# Altium PCB PCB_wt88047.pcbdoc
Units mil, origin at the board's own origin, x right, y up, seen from the top; angles counter-clockwise.
Board outline 3771.1 x 4160 mil, 2 copper layers (Top Layer, Bottom Layer); 64 components, 54 nets, 233 pads, 98 vias.
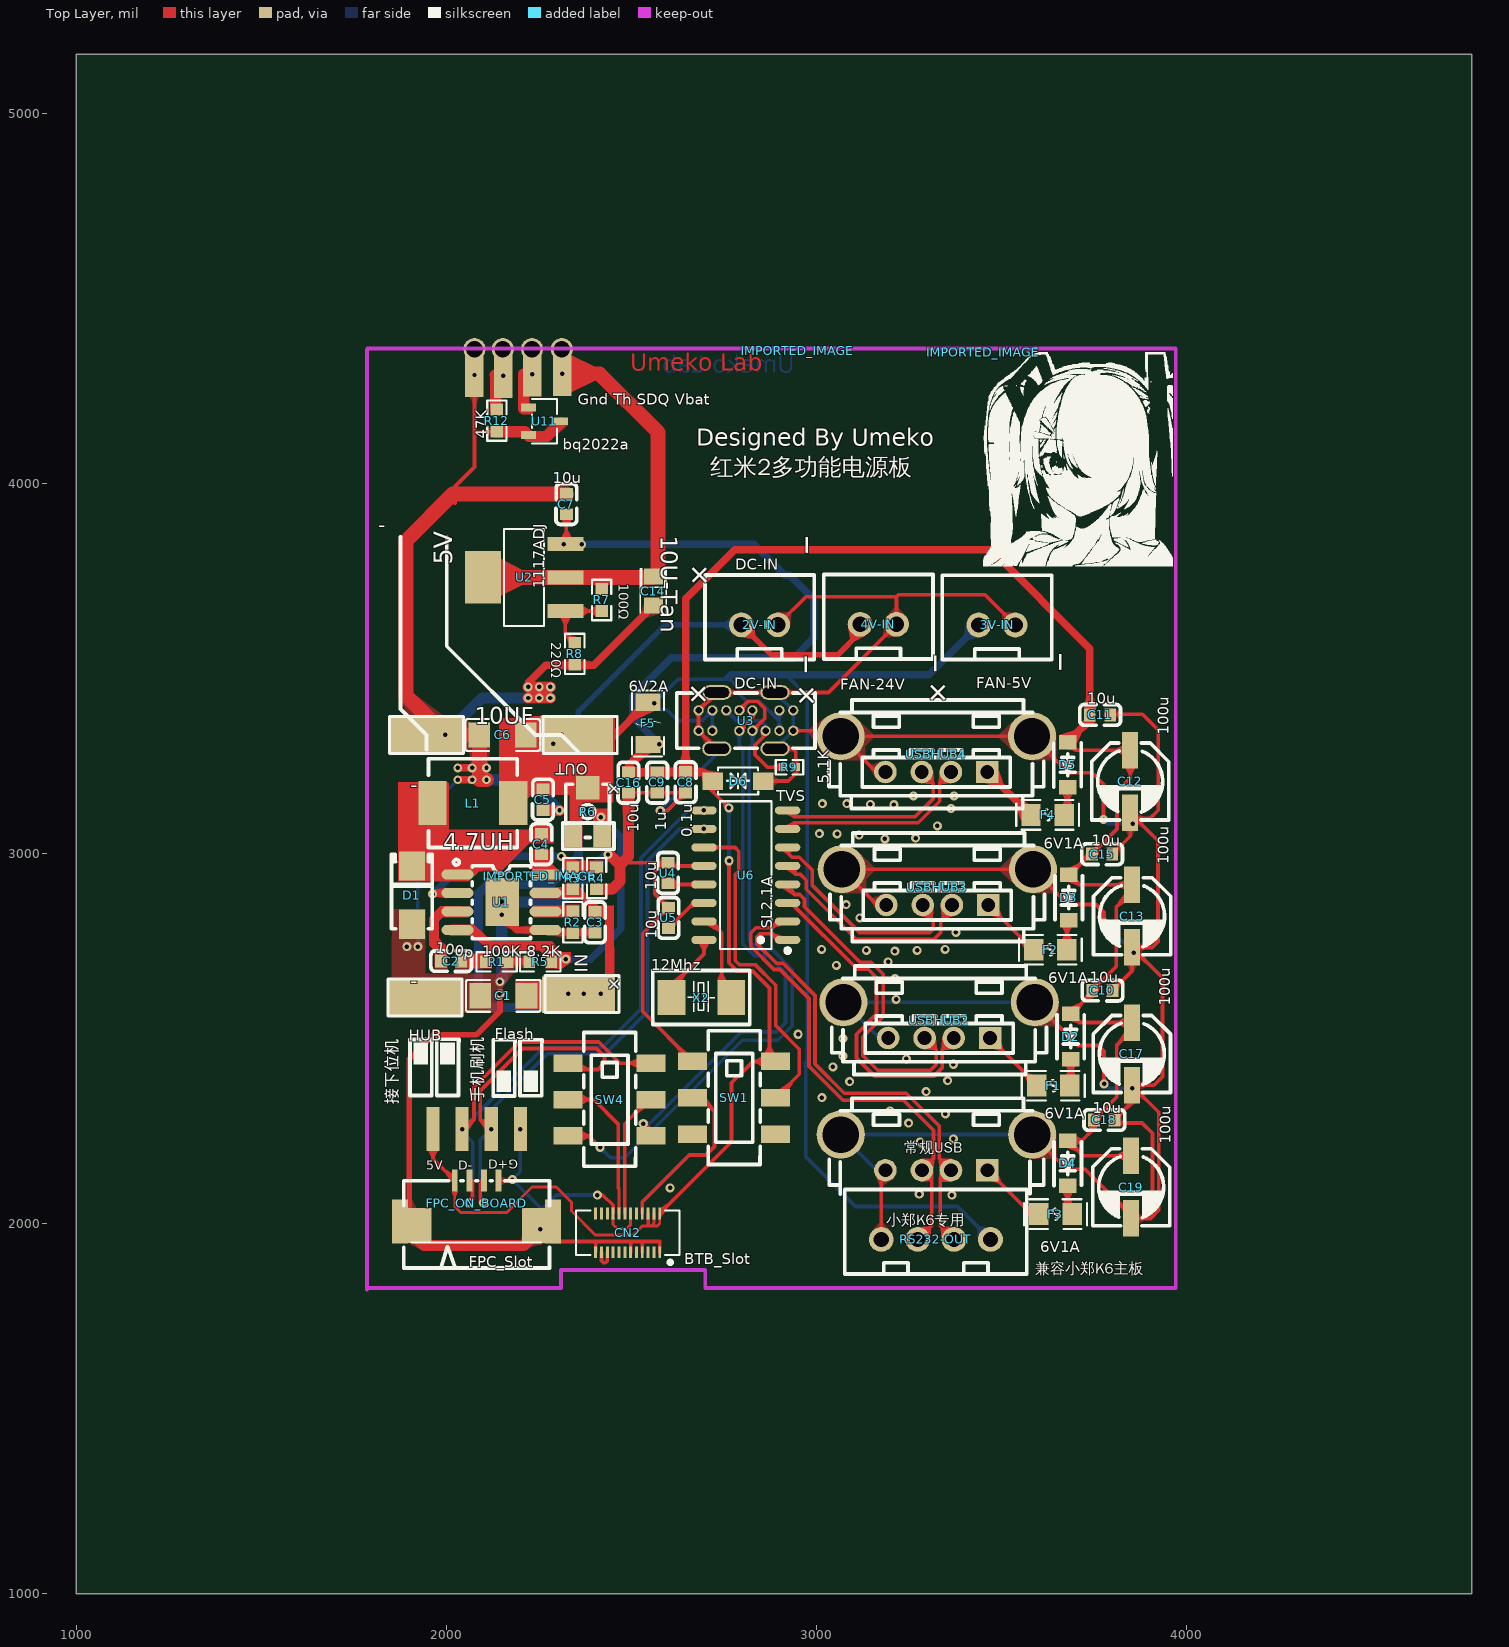
[diagram p0: Top Layer view]
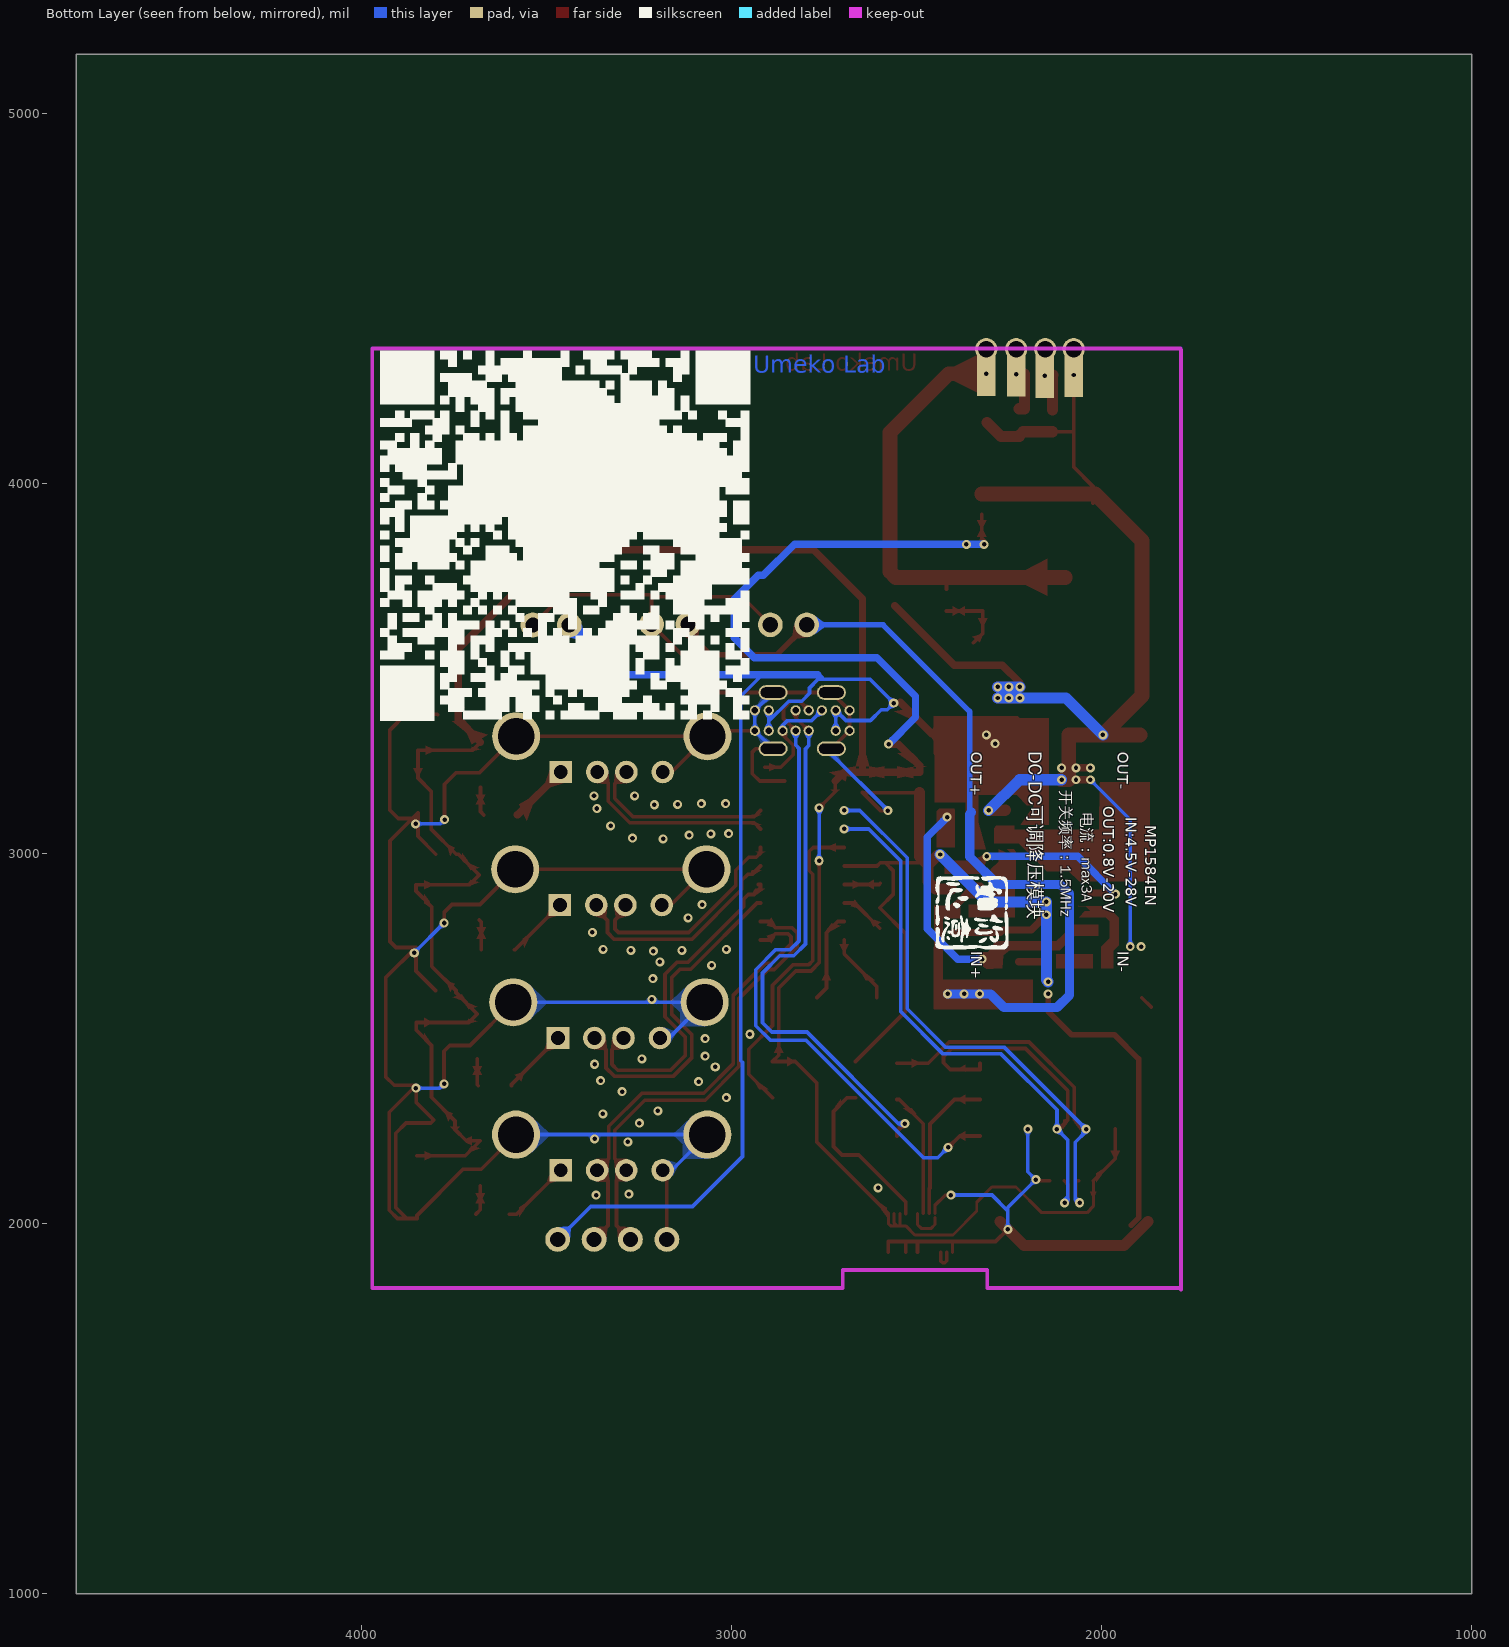
[diagram p1: Bottom Layer view, seen from below]

## Layer stack, top to bottom
Top Layer: signal copper (thickness not stored)
Dielectric: dielectric 12.6, FR-4, Dk 4.8
Bottom Layer: signal copper (thickness not stored)

## Board outline
4771.1,1000 1000,1000 1000,5160 4771.1,5160

## Components (designator, comment, footprint, x,y, rotation, side; value= is the part's Value field where it differs from the comment)
2V-IN "XH2.54-2P 直插" CONN-TH_2P-P2.50-XH2.54-2P 2846.4,3618.4 r180 top
3V-IN "XH2.54-2P 直插" CONN-TH_2P-P2.50-XH2.54-2P 3488.2,3617.9 r180 top
4V-IN "XH2.54-2P 直插" CONN-TH_2P-P2.50-XH2.54-2P 3167.4,3619.7 r180 top
C1 "10u" C1206 2153.66,2615.6 r180 top
C2 "100p" C0603 2012.66,2709.6 r180 top
C3 "100n" C0603 2401.66,2814.41 r90 top
C4 "100n" C0603 2256.66,3025.6 r90 top
C5 "100n" C0603 2260.66,3145.6 r270 top
C6 "10u" C1206 2151.66,3320.6 r180 top
C7 "10u" C0603 2324.2,3944.5 r270 top
C8 "0.1u" C0603 2646.6,3192.8 r90 top
C9 "1u" C0603 2569.8,3192.3 r90 top
C10 "10u" C0603 3773,2630 r180 top
C11 "10uF" C0603 3766.8,3375.1 r180 top
C12 "100uF" CAP-SMD_BD5.0-L5.3-W5.3-RD 3848.2,3194.9 r90 top
C13 "100uF" CAP-SMD_BD5.0-L5.3-W5.3-RD 3853.2,2831 r90 top
C14 "10uF" CAP-SMD_L2.0-W1.3-FD 2559.2,3709.5 r270 top
C15 "10uF" C0603 3772.3,2998.4 r180 top
C16 "10uF" C0603 2492.1,3192.1 r90 top
C17 "100uF" CAP-SMD_BD5.0-L5.3-W5.3-RD 3852.7,2458.5 r90 top
C18 "10uF" C0603 3778,2280 r180 top
C19 "100uF" CAP-SMD_BD5.0-L5.3-W5.3-RD 3850.9,2098.5 r90 top
CN2 "DF37NC-24DS-0.4V(51)" CONN-SMD_DF37NC-24DS-0.4V-51 2489.99,1975.07 r180 top
D1 "SS34" SMA_L4.2-W2.7-LS5.0-RD 1906.66,2887.6 r270 top
D2 "B5817WL" SOD-123F_L2.8-W1.8-LS3.7-RD 3687.6,2505.6 r90 top
D3 "B5817WL" SOD-123F_L2.8-W1.8-LS3.7-RD 3682.4,2881.3 r90 top
D4 "B5817WL" SOD-123F_L2.8-W1.8-LS3.7-RD 3679.6,2162.7 r90 top
D5 "B5817WL" SOD-123F_L2.8-W1.8-LS3.7-RD 3679,3240.1 r90 top
D6 "SMF5.0CA_C435453" SOD-123_L2.7-W1.8-LS3.7-BI 2788.2,3196.1 r180 top
F1 "BSMD0805-100-6V" F0805 3640.2,2372.7 r180 top
F2 "BSMD0805-100-6V" F0805 3632.3,2740.2 r180 top
F3 "BSMD0805-100-6V" F0805 3646.1,2025.5 r180 top
F4 "BSMD0805-100-6V" F0805 3625,3104.5 r180 top
F5 "SL0805200" F1206 2544.7,3351.9 r270 top
FPC_ON_BOARD "AFA01-S04FCC-00" FPC-SMD_AFA01-S04FCC-00 2081.63,2055.53 r0 top
IMPORTED_IMAGE "IMPORTED_IMAGE" IMPORTED_IMAGE 2949.5,4359.6 r0 top
IMPORTED_IMAGE "IMPORTED_IMAGE" IMPORTED_IMAGE 2252.46,2938.3 r0 top
IMPORTED_IMAGE "IMPORTED_IMAGE" IMPORTED_IMAGE 3450.8,4354.7 r0 top
L1 "4.7uH" IND-SMD_L6.0-W6.0_SLF6028T 2071.66,3136.6 r180 top
R1 "100k" R0603 2135.66,2707.6 r180 top
R2 "100k" R0603 2341.66,2814.6 r270 top
R3 "100k" R0603 2341.66,2933.41 r270 top
R4 "100k" R0603 2405.66,2933.6 r270 top
R5 "8.2k" R0603 2253.66,2707.6 r180 top
R6 "200kΩ" RES-ADJ-SMD_VG039NCH 2381.63,3112.64 r270 top
R7 "100" R0603 2419.7,3685.5 r90 top
R8 "200" R0603 2346.8,3540 r270 top
R9 "5.1k" R0402 2927.2,3233.7 r0 top
R12 "47K" R0603 2136.1,4170.5 r270 top
RS232-OUT "XH2.54-4P" CONN-TH_4P-P2.50-XH2.54-4P 3322.9,1957 r180 top
SW1 "MST22D18G2 125" SW-SMD_MST22D18G2 2777.6,2339.8 r270 top
SW4 "MST22D18G2 125" SW-SMD_MST22D18G2 2441,2335.2 r270 top
U1 "MP1584EN" SOIC-8_L4.9-W3.9-P1.27-LS6.0-BL-EP3.3 2148.66,2868.6 r270 top
U2 "AMS1117-ADJ_C5181463" SOT-223-4_L6.5-W3.5-P2.30-LS7.0-BR 2209.9,3746.5 r0 top
U3 "TYPE-C 14PLC-H10.0" USB-C-TH_SHOUHAN_TYPE-C-14PLC-H10.0 2809.4,3359.5 r180 top
U4 "10uF" C0603 2598.7,2947.5 r270 top
U5 "10uF" C0603 2600.1,2826.1 r270 top
U6 "SL2.1A" SOP-16_L10.0-W3.9-P1.27-LS6.0-BL 2809.2,2941.6 r90 top
U11 "BQ2022ADBZR" SOT-23-3_L3.0-W1.7-P0.95-LS2.9-BR 2264.8,4168.7 r180 top
USBHUB2 "U-USBAS04P-F004" USB-A-TH_USB-A-M3A-4PLF 3331.8,2549.8 r180 top
USBHUB3 "U-USBAS04P-F004" USB-A-TH_USB-A-M3A-4PLF 3326.8,2909.3 r180 top
USBHUB4 "U-USBAS04P-F004" USB-A-TH_USB-A-M3A-4PLF 3324.2,3268.8 r180 top
X2 "SMD5032-2PIN_8MHZ±20PPM20P" CRYSTAL-SMD_L5.0-W3.2-1-A 2688.9,2611 r180 top
? "" ? 4100.14,3095.5 r0 top

## Footprints (in the part's own frame and the unit in brackets; to place one, negate y for a bottom-side part, rotate by r counter-clockwise, add the part's x,y. Pads: shape width x height; smd on the part's side, far side on the other; paste and mask are expansions set on the pad)
C0603 [mm]
  rect 0.8x0.9 smd paste+0 mask+0.051: 1(-0.7,0) 2(0.7,0)
  silkscreen extent -1.41,-0.71 1.39,0.72
C1206 [mm]
  rect 1.485x1.728 smd paste-100 mask+0.051: 1(-1.593,0) 2(1.593,0)
  silkscreen extent -2.56,-1.09 2.56,1.09
CAP-SMD_BD5.0-L5.3-W5.3-RD [mm]
  rect 2.5x1.1 smd paste+0 mask+0.051: 1(2.15,0) 2(-2.15,0)
  silkscreen extent -2.65,-2.65 2.64,2.65
CAP-SMD_L2.0-W1.3-FD [mm]
  rect 1.1x1.3 smd paste+0 mask+0.05: 1(-1,0) 2(1,0)
  silkscreen extent -1.57,-0.89 1.52,0.89
CONN-SMD_DF37NC-24DS-0.4V-51 [mm]
  rect 0.2x0.8 smd paste+0 mask+0.051: 1(-2.2,1.325) 2(-2.2,-1.325) 3(-1.8,1.325) 4(-1.8,-1.325) 5(-1.4,1.325) 6(-1.4,-1.325) 7(-1,1.325) 8(-1,-1.325) 9(-0.6,1.325) 10(-0.6,-1.325) 11(-0.2,1.325) 12(-0.2,-1.325) 13(0.2,1.325) 14(0.2,-1.325) 15(0.6,1.325) 16(0.6,-1.325) 17(1,1.325) 18(1,-1.325) 19(1.4,1.325) 20(1.4,-1.325) 21(1.8,1.325) 22(1.8,-1.325) 23(2.2,1.325) 24(2.2,-1.325)
  silkscreen extent -3.56,-1.52 3.56,2.16
CONN-TH_2P-P2.50-XH2.54-2P [mm]
  round 1.7 hole 1.05 paste+0 mask+0.05: 1(1.25,0) 2(-1.25,0)
  silkscreen extent -3.75,-3.42 3.75,2.37
CONN-TH_4P-P2.50-XH2.54-4P [mm]
  round 1.7 hole 1.05 paste+0 mask+0.05: 1(3.75,0) 2(1.25,0) 3(-1.25,0) 4(-3.75,0)
  silkscreen extent -6.25,-3.42 6.25,2.37
CRYSTAL-SMD_L5.0-W3.2-1-A [mm]
  rect 1.9x2.4 smd paste+0 mask+0.051: 1(-2.05,0) 2(2.05,0)
  silkscreen extent -3.32,-1.85 3.33,1.85
F0805 [mm]
  rect 1.335x1.5 smd paste-100 mask+0.051: 1(-1.142,0) 2(1.142,0)
  silkscreen extent -2.16,-1.02 2.16,1.02
F1206 [mil]
  rect 46.85x68.03 smd paste+0 mask+2: 1(-56.89,0) 2(56.89,0)
  silkscreen extent -89,-43 89,43
FPC-SMD_AFA01-S04FCC-00 [mm]
  rect 0.4x1.5 smd paste+0 mask+0.051: 1(-1.501,1.536) 2(-0.501,1.536) 3(0.498,1.536) 4(1.499,1.536)
  rect 2x2.4 smd paste+0 mask+0.051: 5(-4.1,-1.536) 6(4.1,-1.536)
  silkscreen extent -5,-4.46 5,1.53
IMPORTED_IMAGE [mil]
IND-SMD_L6.0-W6.0_SLF6028T [mm]
  rect 1.95x3 smd paste+0 mask+0.051: 1(2.775,0) 2(-2.775,0)
  silkscreen extent -3.05,-3.05 3.05,3.05
R0402 [mm]
  rect 0.566x0.54 smd paste-100 mask+0.051: 1(-0.433,0) 2(0.433,0)
  silkscreen extent -0.94,-0.5 0.94,0.5
R0603 [mil]
  rect 31.75x34.02 smd paste-3937.01 mask+2: 1(-29.65,0) 2(29.66,0)
  silkscreen extent -55,-26 55,26
RES-ADJ-SMD_VG039NCH [mm]
  rect 1.5x1.2 smd paste+0 mask+0.051: 1(1.65,-1) 3(1.65,1)
  rect 1.6x1.6 smd paste+0 mask+0.051: 2(-1.65,0)
  silkscreen extent -1.9,-1.5 1.75,1.5
SMA_L4.2-W2.7-LS5.0-RD [mm]
  rect 2x1.8 smd paste+0 mask+0.051: 1(-2,0) 2(2,0)
  silkscreen extent -2.79,-1.4 2.3,1.4
SOD-123_L2.7-W1.8-LS3.7-BI [mm]
  rect 1.4x1.2 smd paste+0 mask+0.051: 1(-1.735,0) 2(1.735,0)
  silkscreen extent -1.38,-0.93 1.38,0.93
SOD-123F_L2.8-W1.8-LS3.7-RD [mm]
  rect 1x1.2 smd paste+0 mask+0.051: 1(-1.55,0) 2(1.55,0)
  silkscreen extent -1.52,-0.93 1.49,0.95
SOIC-8_L4.9-W3.9-P1.27-LS6.0-BL-EP3.3 [mm]
  oval 0.7x2.2 smd paste+0 mask+0.05: 1(-1.905,-3.023) 2(-0.635,-3.023) 3(0.635,-3.023) 4(1.905,-3.023) 5(1.905,3.023) 6(0.635,3.023) 7(-0.635,3.023) 8(-1.905,3.023)
  rect 3.3x2.3 smd paste+0 mask+0.05: 9(0,0.051)
  silkscreen extent -2.93,-3.29 2.5,2
SOP-16_L10.0-W3.9-P1.27-LS6.0-BL [mm]
  oval 0.56x1.745 smd paste+0 mask+0.051: 1(-4.445,-2.873) 2(-3.175,-2.873) 3(-1.905,-2.873) 4(-0.635,-2.873) 5(0.635,-2.873) 6(1.905,-2.873) 7(3.175,-2.873) 8(4.445,-2.873) 9(4.445,2.873) 10(3.175,2.873) 11(1.905,2.873) 12(0.635,2.873) 13(-0.635,2.873) 14(-1.905,2.873) 15(-3.175,2.873) 16(-4.445,2.873)
  silkscreen extent -5.33,-3.02 5.08,1.77
SOT-23-3_L3.0-W1.7-P0.95-LS2.9-BR [mm]
  rect 1.037x0.532 smd paste+0 mask+0.051: 1(1.101,-0.95) 2(1.101,0.95) 3(-1.101,0)
  silkscreen extent -0.86,-1.53 0.86,1.53
SOT-223-4_L6.5-W3.5-P2.30-LS7.0-BR [mm]
  rect 2.47x0.98 smd paste+0 mask+0.051: 1(2.835,-2.3) 2(2.835,0) 3(2.835,2.3)
  rect 2.47x3.6 smd paste+0 mask+0.051: 4(-2.835,0)
  silkscreen extent -1.37,-3.33 1.37,3.33
SW-SMD_MST22D18G2 [mm]
  rect 1.2x2 smd paste+0 mask+0.051: 1(-2.5,2.85) 2(0,2.85) 3(2.5,2.85) 4(-2.5,-2.85) 5(0,-2.85) 6(2.5,-2.85)
  silkscreen extent -4.6,-1.78 4.57,1.8
USB-A-TH_USB-A-M3A-4PLF [mm]
  rect 1.55x1.524 hole 0.95 paste+0 mask+0.051: 1(-3.5,1.225)
  round 1.55 hole 0.95 paste+0 mask+0.051: 2(-1,1.225) 3(1,1.225) 4(3.5,1.225)
  round 3.3 hole 2.5 paste+0 mask+0.051: 5(-6.57,-1.225) 5(6.57,-1.225)
  silkscreen extent -7.37,-3.72 7.37,3.73
USB-C-TH_SHOUHAN_TYPE-C-14PLC-H10.0 [mm]
  oval 2x1 hole 0.7 slot 1.7 at 0 deg paste+0 mask+0.051: 0(-2,1.93) 0(-2,-1.93) 0(2,1.93) 0(2,-1.93)
  round 0.7 hole 0.45 paste+0 mask+0.051: A1(-3.25,0.7) A4(-2.3,0.7) A5(-1.35,0.7) A6(-0.45,0.7) A7(0.45,0.7) A9(2.3,0.7) A12(3.25,0.7) B1(3.25,-0.7) B4(2.3,-0.7) B5(1.35,-0.7) B6(0.45,-0.7) B7(-0.45,-0.7) B9(-2.3,-0.7) B12(-3.25,-0.7)
  silkscreen extent -4.75,-1.9 4.75,1.9
? [mil]

## Free pads (board coordinates)
  round 60 hole 45 paste+0 mask+2: 1(2075.78,4363.6) 2(2231.26,4363.62) 3(2152.52,4363.62) 4(2312,4363.59)
  rect 35.43x118.11 smd paste+0 mask+2: 1(2199.71,2255.49) 2(2120.97,2255.49) 3(2042.23,2255.49) 4(1963.49,2255.49)
  rect 61.02x60 hole 37.4 paste+0 mask+2: 1(3462.2,2144.1)
  round 61.02 hole 37.4 paste+0 mask+2: 2(3363.76,2144.1) 3(3285.03,2144.1) 4(3186.61,2144.1)
  rect 43.31x118.11 smd paste+0 mask+2: 5(1874.91,2005.49) 6(2288.29,2005.49)
  round 129.92 hole 98.43 paste+0 mask+2: 5(3065.74,2240.56) 5(3583.06,2240.55)
  rect 196.85x98.42 smd paste+0 mask+2: 8(1942,2608.6) 8(1947,3318.6) 8(2352,3323.6) 8(2357,2618.6)
  rect 50x120 hole 12 paste+0 mask+2: 8(2075.78,4293.6) 8(2153.58,4292) 8(2231.38,4295.1) 8(2312.58,4297.2)

## Via types
v1: diameter 24.41, hole 12.2, Top Layer to Bottom Layer, tented both sides, 74 vias
v2: diameter 24, hole 12, Top Layer to Bottom Layer, tented both sides, 24 vias

## Nets (pads, with @x,y where several pads share a name; then routed paths per layer and width w, separated by ;. In a path a pad name is that pad's centre, name@x,y a point inside that pad or via, vN(x,y) a via of type N, cw(c..) or ccw(c..) an arc to the next point about the centre after c; other vN are vias at no path point)
4.2V: C14.1 pad.4@2312,4363.59 pad.8@2312.58,4297.2 R7.2 U2.2 U2.4 | length 1222.7
  Top Layer w10: 2405.9,3745.5 2419.7,3731.7 R7.2
  Top Layer w40: U2.4 2324.8,3746.5 U2.2@2325.8,3745.5 ; pad.8@2312.6,4297.2 2413.4,4297.2 2572,4138.6 2572,3761.7 C14.1 2556.8,3746.5 U2.2
5V: C7.2 C8.2 C9.2 C10.2 C11.2 C12.1 C13.1 C15.2 C16.2 C17.1 C18.2 C19.1 CN2.2 CN2.4 CN2.6 D2.2 D3.2 D4.2 D5.2 D6.2 F5.2 FPC_ON_BOARD.1 pad.4@1963.49,2255.49 SW1.1 U2.3 | length 8408.3
  Top Layer w8: FPC_ON_BOARD.1 2022.5,2046.9 2039.1,2029.3 2162,2029.3 2231.3,2098.6 2297,2098.6 2337.7,2057.9 2337.7,2033.6 2401.9,1969.4 2505.2,1969.4 2529.8,1994 2545.1,1994 2570.3,1994 2576.6,2000.3 CN2.2@2576.6,2027.3 ; 2545.1,1993 2552.8,1993 2560.9,2001.1 CN2.4@2560.9,2027.3
  Top Layer w9.2: 2545.1,1994 CN2.6
  Top Layer w10: pad.4@1963.5,2255.5 1963.5,2175.1 FPC_ON_BOARD.1 ; U2.3@2321.5,3837 2324.2,3837 C7.2 ; CN2.2 2770.5,2221.1 2770.5,2380.4 2828.3,2438.2 SW1.1 2873.1,2454.9 2873.1,2636.8 2827,2682.9 2785.7,2682.9 2763.8,2704.8 v1(2763.8,2980.7) ; D6.2 2719.9,3167.4 v1(2763.5,3123.8) ; D5.2 3700.6,3279.5 C12.1 3848.2,3204 3812.5,3168.3 3812.5,3066.2 C15.2 3738.5,2998.4 D3.2 3709,2915.7 3853.2,2915.7 3853.2,2899 3810.5,2856.3 3810.5,2695.1 C10.2 3745.4,2624.4 D2.2 3711,2543.2 3852.7,2543.2 3852.7,2522.9 3811.5,2481.7 3811.5,2341.1 C18.2 3747.9,2277.5 3747.9,2254.2 3717.4,2223.7 D4.2 3720.1,2183.2 C19.1@3850.9,2183.2
  Top Layer w20: v1(2575.7,3296) 2550.2,3296 2492.1,3237.9 C16.2 C8.2 ; D6.2 2695.6,3220.4 C8.2 ; D5.2 3739.2,3361.3 C11.2 3739.2,3553.9 3472.3,3820.8 2778.9,3820.8 2646.6,3688.5 C8.2
  Bottom Layer w10: v1(2763.5,3123.8) v1(2763.8,2980.7)
  Bottom Layer w20: v1(2317.5,3836.1) 2830.4,3836.1 2914.3,3752.2 2928.3,3752.2 2993.3,3687.2 2993.3,3583.2 2939.3,3529.2 2607.3,3529.2 2503.3,3425.2 2503.3,3368.2 v1(2575.7,3296)
  other v1: 2365.6,3836
ADJ: R7.1 R8.1 U2.1 | length 195.1
  Top Layer w10: R8.1 2321.5,3595 2321.5,3656 2419.5,3656 R7.1
C2_1: C2.1 R1.2
C2_2: C2.2 U1.3
CN2_19: CN2.19 CN2.21 | length 67.9
  Top Layer w9.84: CN2.21 2419.1,1899.2 2424.6,1893.7 2429.7,1893.7 2434.9,1898.9 CN2.19
D1+: U6.8 USBHUB4.3 | length 505.9
  Top Layer w10: U6.8 2939.3,3099.6 2979.3,3099.6 3266.6,3099.6 3316.2,3149.2 3316.2,3189.2 USBHUB4.3
D1-: U6.7 USBHUB4.2 | length 533.7
  Top Layer w10: U6.7 2939.3,3083.6 3275.5,3083.6 3333.7,3141.8 3333.7,3190.7 USBHUB4.2
D1_1: C4.2 D1.1 L1.1 U1.1
D2+: U6.6 USBHUB3.3 | length 601.8
  Top Layer w10: U6.6 2922.3,3001.6 2933.9,2990 2953.9,2990 2989.1,2954.8 2989.1,2913.8 3116.2,2786.7 3306.2,2786.7 3315.5,2796 3315.5,2820.2 3287.4,2848.3 USBHUB3.3
D2-: U6.5 USBHUB3.2 | length 604.1
  Top Layer w10: U6.5 2945.1,2943.8 2956.9,2943.8 2972.6,2928.1 2972.6,2903.8 3107.6,2768.8 3318,2768.8 3335.8,2786.6 3335.8,2819.4 3366.2,2849.8 USBHUB3.2
D2_1: D2.1 F1.1 | length 72.9
  Top Layer w10: F1.1 3687.6,2375.1 D2.1
D3+: U6.4 USBHUB2.3 | length 929.4
  Top Layer w10: U6.4@2927.7,2916.6 U6.4 2922.3,2906.8 2939.8,2889.3 2955,2889.3 2967.9,2876.4 2967.9,2856.3 3118,2706.2 3148,2706.2 3180.4,2673.8 3180.4,2558.9 3125.5,2504 3125.5,2454.5 3165.5,2414.5 3308.1,2414.5 3323.8,2430.2 3323.8,2470.2 USBHUB2.3
D3-: U6.3 USBHUB2.2 | length 918.4
  Top Layer w10: U6.3 2931.4,2866.6 3110.9,2687.1 3139.9,2687.1 3162.5,2664.5 3162.5,2566.1 3108.4,2512 3108.4,2447.2 3157.1,2398.5 3317.7,2398.5 3339.8,2420.6 3339.8,2470.2 USBHUB2.2
D3_1: D3.1 F2.1 | length 82.2
  Top Layer w10: F2.1 3677.3,2815.2 D3.1
D4+: pad.3@3285.03,2144.1 RS232-OUT.2 U6.2 | length 1290.9
  Top Layer w10: U6.2 2899,2816.6 2882,2799.6 2837,2799.6 2822.5,2785.1 2822.5,2749.4 2885.1,2686.8 2901.8,2686.8 2980.2,2608.4 2980.2,2424.9 3071.6,2333.5 3235.1,2333.5 3316.4,2252.2 3316.4,2175.5 pad.3@3285,2144.1 ; RS232-OUT.2 3311.7,1995.01 3311.7,2117.43 pad.3@3285.03,2144.1
D4-: pad.2@3363.76,2144.1 RS232-OUT.3 U6.1 | length 1264.3
  Top Layer w10: U6.1 2899,2766.6 2882.1,2783.5 2847.8,2783.5 2839.7,2775.4 2839.7,2755.9 2891.6,2704 2908.8,2704 2996.2,2616.6 2996.2,2431.6 3075.3,2352.5 3242.8,2352.5 3332.4,2262.9 3332.4,2175.5 pad.2@3363.8,2144.1 ; pad.2@3363.77,2144.1 3334.6,2114.93 3334.6,1994.51 RS232-OUT.3
D4_1: D4.1 F3.1 | length 81
  Top Layer w10: D4.1 3679.6,2037 F3.1
DN: FPC_ON_BOARD.2 pad.3@2042.23,2255.49 SW4.1 U6.9 | length 2221.5
  Top Layer w10: v1(2042.22,2255.5) 2048.8,2255.5 2074.3,2281 2074.3,2368.5 2196.5,2490.7 2411.9,2490.7 2469,2433.6 SW4.1 ; v1(2059.8,2056.25) 2070.2,2066.6 2070.2,2116 FPC_ON_BOARD.2
  Bottom Layer w10: v1(2059.8,2056.25) 2071.4,2067.8 2071.4,2219.8 2042.2,2249 v1(2042.22,2255.5) 2262.9,2476.2 2421.4,2476.2 2525.7,2580.5 2525.7,2988.5 2653.8,3116.6 v1(2696.11,3116.6)
DN_BTB: CN2.14 SW4.2 | length 340.9
  Top Layer w9.2: CN2.14 2482.1,2094.4
  Top Layer w10: 2482.1,2094.4 2482.1,2270 2547.3,2335.2 SW4.2
DN_TYPEC: SW4.3 U3.A7 U3.B7 | length 1472.7
  Top Layer w10: v1(2532,2270) 2553.2,2248.8 SW4.3 ; U3.A7@2791.68,3331.96 2827.08,3367.36 U3.B7
  Bottom Layer w10: v1(2532,2270) 2549,2270 2796.6,2517.6 2891.8,2517.6 2916.7,2542.5 2916.7,2677.5 2870.3,2723.9 2832.4,2723.9 2800.6,2755.7 2800.6,3283 2791.7,3291.9 U3.A7
DP: FPC_ON_BOARD.3 pad.2@2120.97,2255.49 SW4.4 U6.10 | length 2113.8
  Top Layer w10: v1(2100.16,2056) 2091.1,2065.1 2091.1,2105.9 FPC_ON_BOARD.3 ; v1(2121,2255.5) 2115.9,2255.5 2091.7,2279.7 2091.7,2359.3 2205.6,2473.2 2405.5,2473.2 2427.4,2451.3 2427.4,2434.6 2409.4,2416.6 2328.8,2416.6 SW4.4
  Bottom Layer w10: v1(2100.16,2056) 2091.66,2064.5 2091.66,2226.16 v1(2121,2255.5) 2121,2307.5 2272.1,2458.6 2428.9,2458.6 2543.4,2573.1 2543.4,2980.2 2629.8,3066.6 v1(2696.11,3066.6)
DP_BTB: CN2.16 SW4.5 | length 406.9
  Top Layer w9.2: 2464,2095.4 2466.4,2095.4 CN2.16
  Top Layer w10: SW4.5 2397.9,2335.2 2464,2269.1 2464,2095.4
DP_TYPEC: SW4.6 U3.A6 U3.B6 | length 1811.9
  Top Layer w10: SW4.6 2383.9,2236.8 v1(2415.1,2205.6) ; U3.B6 2816.79,3412.15 2840.29,3412.15 2860.29,3392.15 2860.29,3365.11 U3.A6
  Bottom Layer w10: v1(2415.1,2205.6) 2443.1,2177.6 2481.7,2177.6 2799.3,2495.2 2895.5,2495.2 2935,2534.7 2935,2686.2 2880.7,2740.5 2841.8,2740.5 2818.2,2764.1 2818.2,3284.4 2827.1,3293.3 U3.A6
F4_1: D5.1 F4.1 | length 78.3
  Top Layer w10: F4.1 3679,3113.5 D5.1
GND: 2V-IN.2 3V-IN.2 4V-IN.2 C1.2 C3.1 C5.2 C6.2 C7.1 C8.1 C9.1 C10.1 C11.1 C12.2 C13.2 C14.2 C15.1 C16.1 C17.2 C18.1 C19.2 CN2.1 CN2.7 CN2.11 CN2.12 CN2.18 CN2.23 D1.2 D6.1 FPC_ON_BOARD.4 FPC_ON_BOARD.5 FPC_ON_BOARD.6 pad.1@2075.78,4363.6 pad.1@2199.71,2255.49 pad.4@3186.61,2144.1 pad.5 pad.6 pad.8@1942,2608.6 pad.8@1947,3318.6 pad.8@2075.78,4293.6 R1.1 R2.2 R4.2 R5.2 R8.2 R9.2 R12.2 RS232-OUT.1 SW1.4 U1.5 U1.9 U3.0 U3.A1 U3.A12 U3.B1 U3.B12 U4.1 U5.1 U6.12 U11.2 U11.3 USBHUB2.4 USBHUB2.5 USBHUB3.4 USBHUB3.5 USBHUB4.4 USBHUB4.5 | length 18259.3
  Top Layer w8: CN2.18@2450.5,2016.5 2450.5,1997.2 2460.6,1987.1 2488,1987.1 2497.9,1997 CN2.12@2497.9,2027.3
  Top Layer w9.05: 2403.2,1951.3 2403.4,1940.1 CN2.23
  Top Layer w9.2: v1(2407.9,2077) 2422.7,2077 2450.6,2049.1 CN2.18@2450.6,2027.3
  Top Layer w10: pad.8@1865.66,2584.6 pad.8@1891.66,2610.6 ; 2023.3,3947 2023.3,3992.6 2075.8,4045.1 pad.8@2075.8,4293.6 ; 2075.8,4140.2 R12.2@2133.2,4140.2 ; FPC_ON_BOARD.4 2175.4,2116 v1(2178,2118.6) ; FPC_ON_BOARD.6@2253.5,1984.5 2286.8,1951.3 2403.2,1951.3 2576.6,1951.3 CN2.1 ; v2(2436.66,2997.6) 2459.2,2975.1 U4.1 ; C16.1 C8.1 2597.6,3116.2 v1(2577.9,3116.2) ; 2497.8,1951.3 2497.9,1940.1 CN2.11 ; CN2.7@2529.4,1922.2 2529.4,1939.4 2529.6,1951.3 ; SW1.4 2530.3,2573.3 2530.3,2783.9 U5.1 2563,2890.8 2563,2953.2 2584.9,2975.1 U4.1 ; U3.A12 U3.0@2730.7,3283.5 ; U3.B1 2730.7,3435.5 U3.0@2888.1,3435.5 ; U3.A12 U3.B1@2681.43,3387.02 ; U6.12 2607.2,2966.6 U4.1 ; D6.1 2924.2,3196.1 2944.2,3216.1 R9.2 2944.2,3274.6 2935.4,3283.5 U3.0@2888.1,3283.5 ; U3.0@2888.2,3435.5 3032.4,3435.5 4V-IN.2 3216.61,3694.51 ; 2V-IN.2 2971.74,3694.51 3216.61,3694.51 ; U3.A1 3050.62,3331.95 USBHUB4.5@3065.54,3317.03 ; RS232-OUT.1 3175.26,2132.75 pad.4@3186.61,2144.1 ; USBHUB4.4 3162,3220.57 USBHUB4.5@3065.54,3317.03 ; USBHUB3.4 3164.6,2861.07 3068.14,2957.53 3585.47,2957.53 3680.6,2862.4 3756,2862.4 3777.4,2841 v1(3777.4,2812.4) ; 3V-IN.2 3455.72,3699.6 3221.7,3699.6 3216.61,3694.51 ; pad.5@3583.1,2240.6 3676.8,2146.8 3726.2,2146.8 3850.9,2022.1 C19.2@3850.9,2013.8 ; USBHUB2.5@3590.47,2598.03 3707.2,2481.3 3761.9,2481.3 3777.6,2465.6 v1(3777.6,2377.5) ; v1(3776.1,3091.9) 3776.1,3187.4 3745.1,3218.4 3681.5,3218.4 3582.87,3317.03 USBHUB4.5@3065.54,3317.03 ; C11.1 3796.2,3376.9 3881.1,3376.9 3924,3334 3924,3117.1 3901.6,3094.7 3848.2,3094.7 C12.2 ; C15.1 3848.2,3046.7 C12.2 ; C10.1 3853.2,2682.6 C13.2@3853.2,2746.3 ; C12.2 3923.5,3035 3923.5,2762.1 3907.8,2746.3 C13.2@3853.2,2746.3 ; C19.2@3850.9,2013.8 3903.3,2013.8 3925.5,2036.1 3925.5,2301.1 C17.2@3852.7,2373.8 ; C19.2@3850.9,2013.8 3878.7,2013.8 3908.2,2043.3 3908.2,2244 3880.3,2271.9 3813.7,2271.9 C18.1 3852.7,2327.1 C17.2@3852.7,2373.8 ; C17.2@3852.7,2373.8 3912.2,2373.8 3935.5,2397.1 3935.5,2664.1 C13.2@3853.2,2746.3
  Top Layer w15: FPC_ON_BOARD.5@1920.2,1995.1 1900,2015.3 1900,2445.1 1965.3,2510.4 2081.3,2510.4 2144.7,2573.8 v2(2144.66,2620.6)
  Top Layer w20: v2(2030.66,3199.6) v2(2108.26,3199.6) ; v2(2030.66,3231.6) v2(2108.26,3231.6) ; v2(2149.36,2834.6) 2190.4,2793.6 U1.5 2274.5,2786.8 C3.1@2401.7,2786.8 ; R1.1@2165.4,2707.6 R5.2 ; v2(2220.9,3450.5) 2220.9,3461.5 2268.4,3509 2398.1,3509 C14.2
  Top Layer w30: pad.5@1874.9,2005.5 1939.9,1940.5 2209.5,1940.5 pad.6@2274.5,2005.5 ; R12.2@2133.2,4140.2 2212.5,4140.2 U11.2 2222.7,4130 2222.7,4127.7 2272.1,4127.7 U11.3@2309.5,4165.1 ; v2(2220.9,3420.5) v2(2280.9,3420.5) ; v2(2220.9,3450.5) v2(2280.9,3450.5) ; C5.2 2262.1,3116.6 v2(2305.66,3116.6) ; R4.2 2448.7,2903.9 2469.4,2924.6 2469.4,2969.6 ; v2@2442.5,2996.5 2469.4,2969.6 ; C16.1 2492.1,2992.3 2469.4,2969.6
  Top Layer w40: pad.8@1896.7,3320.6 C6.2 2089,3199.6 v2(2108.26,3199.6) ; v1(1996.7,3320.6) 1890.9,3426.4 1890.9,3845.8 2017.2,3972.1 C7.1
  Bottom Layer w10: v2(1922.8,2748.65) 1922.8,3091.74 v2(2030.66,3199.6) ; v1(2199.7,2255.5) 2199.7,2140.3 v1(2178,2118.6) 2253.6,2043.1 v1(2253.55,1984.55) 2253.6,2034.1 2296.5,2077 v1(2407.9,2077) ; v1(2577.9,3116.2) 2730.7,3269 U3.0@2730.7,3283.5 ; U3.0@2888.1,3283.5 U3.A1 ; U3.0@2888.1,3435.5 U3.B12 ; U3.A1 U3.B12 ; pad.4@3186.61,2144.1 3162.2,2144.1 3065.74,2240.56 pad.5@3583.07,2240.56 ; USBHUB2.4 3169.6,2501.57 3073.14,2598.03 USBHUB2.5@3590.47,2598.03 ; v1(3776.1,3091.9) 3787.6,3080.4 v1(3854.6,3080.4) ; v1(3777.4,2812.4) v1(3858.1,2731.7) v1@3861.7,2731.7 ; v1(3777.6,2377.5) 3789,2366.1 v1(3854,2366.1)
  Bottom Layer w30: v1(1996.7,3320.6) 2096.56,3420.5 v2(2250.9,3420.5) ; v2(2108.26,3199.6) 2222.66,3199.6 v2(2305.66,3116.6) ; v2(2144.66,2653.6) 2149.36,2658.3 v2(2149.36,2834.6) v2(2149.36,2869.6) 2308.66,2869.6 v2(2436.66,2997.6) ; v2(2220.9,3420.5) v2(2280.9,3420.5) ; v2(2220.9,3450.5) v2(2280.9,3450.5)
  other v1: 3366.48,2076.56 3278,2079.6 2604.5,2096.5 3280.5,2220.6 3370.5,2228.6 3249.5,2271.6 3348.5,2296.6 3199.48,2304.73 3014.5,2340.6 3296.5,2356.6 3089.5,2383.6 3354.5,2386.6 3044.5,2423.6 3370.5,2430.6 3243.1,2445.2 3071.8,2452.8 3071.8,2499.94 2950.8,2511.7 3215.7,2605.7 3212.85,2662.2 3054.3,2697.8 3193.9,2707.3 3211.9,2736.2 3135,2738.5 3272.5,2738.5 3014.3,2741.4 3347.8,2741.3 3376.8,2787.3 3117.6,2826.3 3080.1,2861.8 3185.2,3040 3268.2,3042 3115.2,3050 3008.2,3054 3056.2,3053.5 3327.2,3075 3364.24,3121.91 3209.2,3132 3146.2,3133 3016.2,3135 3082.2,3135 3262.24,3156 3372.24,3156
  other v2: 1893.23,2748.65 2069.46,3199.6 2069.46,3231.6 2250.9,3450.5
HUB_5V: SW1.2 U6.11 | length 891.9
  Top Layer w10: U6.11 2779.8,3016.6 2790.3,3006.1 2790.3,2953.5 2780.7,2943.9 2780.7,2710.6 2791.4,2699.9 2833.8,2699.9 2889.8,2643.9 2889.8,2535.3 2953.8,2471.3 2953.8,2403.8 SW1.2
ID: CN2.8 SW1.5 | length 458.2
  Top Layer w10: CN2.8 2529.4,2058.4 2656.4,2185.4 2701.7,2185.4 2724.8,2208.5 2724.8,2303.5 2688.5,2339.8 SW1.5
IN+: 2V-IN.1 4V-IN.1 C1.1 C3.2 pad.8@2357,2618.6 R3.2 U1.7 | length 2283
  Top Layer w15: 2V-IN.1 2877.59,3538 3059.1,3538 3118.18,3597.09 4V-IN.1
  Bottom Layer w15: 2356.7,3106.6 2356.7,3384.1 2591,3618.4 2V-IN.1
  Bottom Layer w25: 2351.7,3111.6 2356.7,3106.6 2356.7,2991.6 2281.7,2916.6 2111.7,2916.6 2086.7,2891.6 2086.7,2617.8 2120.7,2583.8 2263.9,2583.8 2300.7,2620.6 v1(2329.73,2620.6) v1(2371.73,2620.6) v1(2416.7,2620.6)
R2_1: R2.1 U1.6
R3_1: R3.1 R4.1 U1.2 | length 501.7
  Top Layer w20: v2(1962.66,2890.6) 1965.7,2893.6 U1.2 ; v2(2310.66,2992.6) 2312.2,2992.6 R3.1
  Bottom Layer w20: v2(1962.66,2890.6) 2064.66,2992.6 v2(2310.66,2992.6)
R5_1: R5.1 R6.3 U1.4 | length 506.9
  Bottom Layer w20: v2(2322.66,2714.6) 2389.4,2714.6 2471.4,2796.6 2471.4,3044.9 v2(2417.66,3098.6)
S$12836: 
S$13477: 
S$17551: 
S$21464: 
S$21468: 
S$30078: 
S$33939: 
S$68450: 
S$106804: 
SDQ: pad.2@2231.26,4363.62 pad.8@2231.38,4295.1 U11.1 | length 108
  Top Layer w30: pad.8@2208.9,4296.7 2208.9,4202.5 U11.1@2222.7,4202.5
TH: pad.3@2152.52,4363.62 pad.8@2153.58,4292 R12.1 | length 95
  Top Layer w30: pad.8@2131.1,4293.6 2133.2,4291.5 R12.1@2133.2,4199.5
U1_8: C4.1 U1.8
U3_A5: R9.1 U3.A5 U3.B5 | length 304.3
  Top Layer w10: U3.A5 2862.5,3321.4 2833.9,3292.8 2833.9,3267.4 2867.5,3233.7 R9.1
  Bottom Layer w10: U3.B5 2783.78,3359.46 2849.38,3359.46 2862.49,3346.36 U3.A5
U4_2: U4.2 U6.13 | length 98.8
  Top Layer w10: U4.2 2602,2916.6 U6.13
U5_2: U5.2 U6.14 | length 124.2
  Top Layer w10: U5.2 2668.2,2866.6 U6.14
U6_15: U6.15 X2.1 | length 246
  Top Layer w10: U6.15 2713.1,2816.6 2743.8,2785.9 2743.8,2636.8 X2.1
U6_16: U6.16 X2.2 | length 192
  Top Layer w10: X2.2 2608.2,2641 2696.1,2728.9 U6.16
USBHUB1_1: F4.2 USBHUB4.1 | length 166.1
  Top Layer w20: USBHUB4.1 3578.1,3104.5 F4.2
USBHUB2_1: F1.2 USBHUB2.1 | length 180.9
  Top Layer w10: USBHUB2.1 3595.2,2376 F1.2
USBHUB3_1: F2.2 USBHUB3.1 | length 172.8
  Top Layer w10: USBHUB3.1 3585.5,2740.2 F2.2
USBHUB4_1: F3.2 pad.1@3462.2,2144.1 | length 188
  Top Layer w10: pad.1@3462.2,2144.1 3580.8,2025.5 F3.2
VBUS: 3V-IN.1 C5.1 C6.1 F5.1 L1.2 pad.8@2352,3323.6 R6.1 R6.2 RS232-OUT.4 U3.A4 U3.A9 U3.B4 U3.B9 | length 3763.5
  Top Layer w20: pad.8@2352,3323.6 2459.5,3323.6 F5.1
  Bottom Layer w10: v1@2562,3406.9 2579.9,3389.1 2595.7,3389.1 2625.2,3359.6 2691.4,3359.6 U3.B4@2718.9,3387.1 ; v1(2562.05,3406.95) 2626.2,3471.1 2766.5,3471.1 2789.7,3447.9 2789.7,3433.1 2810.7,3412.1 2845.9,3412.1 2899.9,3358.1 ; U3.A9 U3.B4@2718.83,3387.02 ; 2755.7,3471.1 2755.7,3476.7 2762.2,3483.2 2917.5,3483.2 2975.5,3425.2 2975.5,2440.2 2970.8,2435.5 2970.8,2181.3 3105.9,2046.2 3381.3,2046.2 RS232-OUT.4 ; U3.A4@2899.94,3331.9 U3.B9@2899.94,3387.02
  Bottom Layer w20: 2767.8,3483.2 3304.29,3483.2 3V-IN.1
  other v1: 2288.22,3297.52 2311.7,3321
pads on no net: CN2.3 CN2.5 CN2.9 CN2.10 CN2.13 CN2.15 CN2.17 CN2.20 CN2.22 CN2.24 SW1.3 SW1.6

## Polygon pours and split planes (outlines as drawn)
GND on Bottom Layer (solid): 1506.8,4613 1585.4,4534.4 4256.8,4534.4 4271.1,4520.1 4271.1,1591.5 4221.1,1641.5 1535.4,1641.5
GND on Top Layer (solid): 1500,4660 4080,4660 4150,4590 4150,1600 4250,1500 1580,1500 1520,1560

## Other copper
Top Layer:
  region net HUB_5V: 2719.44,3005.58 2719.44,3027.62 2734.44,3021.6 2734.44,3011.6
  region net U4_2: 2672.78,2905.58 2672.78,2927.62 2657.78,2921.6 2657.78,2911.6
  region net U5_2: 2678.71,2857.31 2666.85,2875.89 2657.38,2862.85 2662.89,2854.22
  region net U6_15: 2729.58,2812.29 2705.5,2805.58 2730.7,2791.93 2744.1,2792.67
  region net U6_16: 2708.6,2755.58 2683.6,2755.58 2691.1,2740.58 2701.1,2740.58
  region net D1+: 2945.82,3105.58 2920.82,3105.58 2932.23,3099.6 2942.84,3103.14
  region net D1-: 2920.82,3077.62 2945.82,3077.62 2942.84,3080.06 2932.23,3083.6
  region net D2+: 2934.8,3005.58 2909.8,3005.58 2917.3,3001.6 2927.3,3001.6
  region net D2-: 2945.82,2955.58 2920.82,2955.58 2938.03,2943.8 2948.64,2947.34
  region net D3+: 2936.02,2905.58 2911.02,2905.58 2931.45,2890.58 2945.59,2890.58
  region net D4+: 2905.71,2805.58 2893.21,2826 2882.64,2807.31 2889.74,2800.27
  region net D4-: 2893.21,2757.2 2905.71,2777.62 2889.74,2782.93 2882.63,2775.89
  region net R3_1: 2000.13,2879.82 2000.13,2907.38 1970.13,2903.6 1970.13,2883.6
  region net 4.2V: 2337.58,4347.2 2337.58,4247.2 2397.58,4277.2 2397.58,4317.2
  region net USBHUB4_1: 3492.71,2130.47 3473.81,2114.1 3490.51,2108.72 3498.09,2115.28
  region net 4.2V: 2146.91,3796.5 2146.91,3696.5 2206.91,3726.5 2206.91,3766.5
  region net 5V: 2336.7,3856.34 2311.7,3856.34 2319.2,3871.34 2329.2,3871.34
  region net ADJ: 2370.13,3643.5 2370.13,3668.5 2385.13,3661 2385.13,3651
  region net ADJ: 2309,3636.66 2334,3636.66 2326.5,3621.66 2316.5,3621.66
  region net U4_2: 2616.42,2929.1 2616.42,2904.19 2631.42,2911.6 2631.42,2921.6
  region net U5_2: 2596.11,2814.29 2617.82,2801.88 2624.19,2815.51 2615.19,2820.66
  region net USBHUB2_1: 3500.11,2488.01 3481.27,2471.57 3497.93,2466.2 3505.48,2472.79
  region net USBHUB3_1: 3495.11,2847.51 3476.27,2831.07 3492.93,2825.7 3500.48,2832.29
  region net USBHUB1_1: 3492.51,3224.71 3455.98,3190.57 3488.53,3179.93 3503.15,3193.59
  region net U6_15: 2732.21,2658.24 2756.3,2658.24 2748.8,2673.24 2738.8,2673.24
  region net U6_16: 2612.94,2658.24 2637.94,2658.24 2647.52,2673.24 2633.37,2673.24
  region net U3_A5: 2899.03,3244.33 2899.03,3223.07 2884.03,3228.7 2884.03,3238.7
  region net ADJ: 2329.79,3571 2350.13,3585.53 2332.33,3591.24 2324.08,3585.35
  region net ADJ: 2402.69,3668.5 2402.69,3643.5 2387.69,3651 2387.69,3661
  region net 4.2V: 2407.2,3731.03 2432.2,3731.03 2424.7,3731.7 2414.7,3731.7
  region net R3_1: 2324.65,2947.19 2358.67,2978.94 2327.79,2991.15 2313.16,2977.5
  region net DP: 2093.39,2106.12 2091.1,2112.97 2093.39,2120.69 2093.39,2106.12
  region net DP: 2093.39,2095.69 2093.39,2106.12 2094.64,2102.36 2093.39,2095.69
  region net DN: 2069.78,2128.5 2069.78,2103.5 2070.2,2111 2070.2,2121
  region net 5V: 2014.69,2111.33 2014.69,2136.33 1999.69,2145.93 1999.69,2131.77
  region net 5V: 2030.38,2086.5 2014.69,2086.5 2018.5,2074.5 2026.5,2074.5
  region net 5V: 2580.54,2042.98 2580.54,2018.64 2595.54,2039.07 2595.54,2053.21
  region net 5V: 2336.7,3901.19 2311.7,3901.19 2319.2,3886.19 2329.2,3886.19
  region net DP: 2368.17,2429.1 2368.17,2410 2383.17,2411.6 2383.17,2421.6
  region net DN_TYPEC: 2529.11,2260.39 2554.11,2260.39 2539.07,2270 2528.46,2266.46
  region net DN_BTB: 2536.18,2311.58 2513.84,2311.58 2501.61,2296.58 2515.75,2296.58
  region net DN: 2513.84,2421.1 2513.84,2446.1 2498.84,2438.6 2498.84,2428.6
  region net DP_TYPEC: 2368.17,2249.3 2368.17,2224.3 2383.17,2231.8 2383.17,2241.8
  region net DP_BTB: 2368.17,2347.7 2368.17,2322.7 2383.17,2330.2 2383.17,2340.2
  region net HUB_5V: 2900.92,2363.42 2925.92,2363.42 2935.49,2378.42 2921.35,2378.42
  region net 5V: 2850.44,2425.7 2850.44,2450.7 2835.44,2443.2 2835.44,2433.2
  region net 5V: 2860.6,2461.84 2885.6,2461.84 2878.1,2476.84 2868.1,2476.84
  region net ID: 2704.77,2336.03 2704.77,2316.18 2719.77,2301.45 2719.77,2315.6
  region net F4_1: 3666.5,3134.03 3691.5,3134.03 3684,3149.03 3674,3149.03
  region net USBHUB1_1: 3553.74,3088.69 3574.82,3134.03 3548.39,3148.35 3539.42,3129.04
  region net D4_1: 3667.1,2055.03 3692.1,2055.03 3684.6,2070.03 3674.6,2070.03
  region net USBHUB4_1: 3574.84,2018.96 3574.84,2043.96 3559.84,2053.53 3559.84,2039.39
  region net D3_1: 3664.78,2769.73 3689.78,2769.73 3682.28,2784.73 3672.28,2784.73
  region net USBHUB3_1: 3561.04,2745.06 3565.1,2769.73 3551.76,2781.01 3549.76,2768.87
  region net D2_1: 3675.1,2402.23 3700.1,2402.23 3692.6,2417.23 3682.6,2417.23
  region net USBHUB2_1: 3568.94,2384.62 3586.69,2402.23 3570.74,2407.53 3563.64,2400.49
  region net 5V: 2692.34,3195.15 2735.88,3219.72 2704.64,3225.5 2688.53,3213.33
  region net 5V: 2732.4,3172.48 2707.4,3172.48 2714.9,3167.4 2724.9,3167.4
  region net F4_1: 3691.5,3159.4 3666.5,3159.4 3674,3144.4 3684,3144.4
  region net 5V: 3659.08,3320.8 3702.62,3296.22 3715.45,3323.43 3697.37,3333.63
  region net 5V: 3702.62,3288.28 3678.58,3281.43 3695.07,3277.98 3704.11,3283.09
  region net D4_1: 3692.1,2082 3667.1,2082 3674.6,2067 3684.6,2067
  region net 5V: 3703.22,2236.22 3703.22,2211.22 3717.42,2218.72 3717.42,2228.72
  region net 5V: 3703.22,2210.88 3679.18,2204.03 3701.46,2194.78 3712.47,2197.92
  region net D3_1: 3689.78,2800.59 3664.78,2800.59 3672.28,2785.59 3682.28,2785.59
  region net 5V: 3706.02,2929.48 3681.98,2922.64 3703.52,2914.13 3712.56,2919.24
  region net 5V: 3681.98,2962.01 3706.02,2955.16 3715.28,2968.13 3704.27,2971.26
  region net D2_1: 3700.1,2424.89 3675.1,2424.89 3682.6,2409.89 3692.6,2409.89
  region net 5V: 3711.22,2553.77 3687.18,2546.93 3705.51,2541.63 3714.55,2546.74
  region net 5V: 3687.18,2586.31 3711.22,2579.46 3720.48,2592.42 3709.47,2595.56
  region net 5V: 3829.25,2170.7 3829.25,2195.7 3814.25,2188.2 3814.25,2178.2
  region net 5V: 3753.78,2297.72 3766.19,2276.01 3772.56,2295.09 3767.42,2304.09
  region net 5V: 3760.4,2262.28 3735.4,2262.28 3742.9,2254.2 3752.9,2254.2
  region net 5V: 3831.05,2530.7 3831.05,2555.7 3816.05,2548.2 3816.05,2538.2
  region net 5V: 3831.05,2493.93 3831.05,2513.75 3816.05,2493.32 3816.05,2479.18
  region net 5V: 2474.38,3235.41 2509.82,3235.41 2502.1,3237.9 2482.1,3237.9
  region net 5V: 2509.82,3235.41 2509.82,3203.91 2539.82,3209.92 2539.82,3229.92
  region net 5V: 3748.08,3016.12 3760.49,2994.42 3766.86,3013.49 3761.72,3022.49
  region net 5V: 3728.99,2980.68 3728.99,3001.41 3713.99,2980.98 3713.99,2966.84
  region net 5V: 3831.55,2866.43 3831.55,2889.85 3816.55,2869.42 3816.55,2855.28
  region net 5V: 3831.55,2903.2 3831.55,2928.2 3816.55,2920.7 3816.55,2910.7
  region net 5V: 3860.7,3230.33 3835.7,3230.33 3843.2,3215.33 3853.2,3215.33
  region net 5V: 3826.55,3267.05 3826.55,3292.05 3811.55,3284.55 3811.55,3274.55
  region net 5V: 3723.49,3392.82 3754.99,3392.82 3749.2,3422.82 3729.2,3422.82
  region net 5V: 3754.99,3357.38 3723.49,3361.94 3698.92,3335.18 3723.63,3331.61
  region net 5V: 3748.78,2647.72 3761.19,2626.01 3767.56,2645.09 3762.42,2654.09
  region net 5V: 3753.44,2612.28 3729.7,2620.1 3721.06,2607.15 3731.7,2603.65
  region net 5V: 2587.52,3235.61 2587.52,3204.11 2617.52,3210.27 2617.52,3230.27
  region net 5V: 2552.08,3204.11 2552.08,3235.61 2522.08,3229.84 2522.08,3209.84
  region net 5V: 2664.32,3236.11 2664.32,3204.61 2694.32,3210.4 2694.32,3230.4
  region net 5V: 2628.88,3236.11 2664.32,3236.11 2656.6,3266.11 2636.6,3266.11
  region net 5V: 2628.88,3204.61 2628.88,3236.11 2598.88,3230.18 2598.88,3210.18
  region net 5V: 2550.78,3271.58 2510.68,3271.58 2481.64,3241.58 2509.92,3241.58
  region net VBUS: 2560.17,3385.36 2510.68,3392.49 2487.31,3365.55 2512.03,3361.99
  region net VBUS: 2450.42,3348.6 2450.42,3298.6 2459.5,3313.6 2459.5,3333.6
  region net DP: 2103.25,2255.65 2103.25,2280.65 2095.24,2283.24 2091.7,2272.63
  region net DN: 2059.94,2279.14 2059.94,2254.14 2074.3,2273.93 2070.76,2284.54
  region net 5V: 1976,2196.44 1951,2196.44 1958.5,2181.44 1968.5,2181.44
  region net 5V: 2567.63,3286.85 2567.63,3305.15 2559.08,3306 2559.08,3286
  region net 5V: 2764.26,3135.98 2751.32,3123.04 2748.21,3132.01 2755.28,3139.09
  region net 5V: 2754.65,2972.63 2772.96,2972.63 2768.8,2964.08 2758.8,2964.08
  region net 5V: 2312.38,3847.18 2329.13,3839.79 2329.2,3849.1 2319.2,3853.51
  region net DN_TYPEC: 2544.18,2270.76 2531.24,2257.82 2540.21,2254.71 2547.29,2261.79
  region net DP_TYPEC: 2415.86,2217.78 2402.92,2204.84 2399.82,2213.81 2406.89,2220.88
  region net R3_1: 1972.11,2883.21 1968.81,2900.9 1976.85,2903.6 1980.59,2883.6
  region net R3_1: 2322.56,2994.15 2310.71,2980.6 2316.36,2974.3 2329.56,2989.39
  region net DN: 2053.7,2251.35 2044.9,2267.41 2054.29,2268.06 2059.29,2258.92
  region net DP: 2119.1,2267.56 2109.27,2252.11 2104.23,2260.1 2109.73,2268.74
  region net DN: 2071.98,2055.46 2059.06,2068.43 2066.67,2070.14 2073.73,2063.06
  region net DP: 2100.95,2068.18 2087.98,2055.26 2087.56,2061.57 2094.65,2068.63
  region net D4-: 3333.31,2142.21 3365.69,2174.55 3337.95,2177.02 3330.87,2169.96
  region net D4-: 3333.32,2146.01 3365.68,2113.65 3338.13,2111.39 3331.06,2118.47
  region net D4+: 3283.1,2174.55 3315.49,2142.21 3317.93,2169.96 3310.85,2177.02
  region net D4+: 3283.12,2113.65 3315.48,2146.01 3315.24,2120.97 3308.17,2113.89
  region net D4-: 3338.71,1954.9 3374.21,1990.4 3343.43,1992.75 3336.36,1985.68
  region net D4+: 3271.6,1990.4 3307.09,1954.9 3309.44,1985.68 3302.37,1992.75
  region net IN+: 2795.09,3585 2830.59,3620.5 2834.71,3591.49 2824.1,3580.88
  region net D3+: 3290.52,2471.12 3322.88,2503.48 3325.34,2475.73 3318.27,2468.66
  region net D3-: 3340.72,2503.48 3373.08,2471.12 3345.33,2468.66 3338.26,2475.73
  region net D2+: 3317.57,2856.3 3278.93,2831.77 3305.37,2823.26 3314.02,2828.75
  region net D2-: 3373.9,2831.55 3335.92,2857.09 3338.77,2829.44 3347.22,2823.75
  region net D1+: 3282.92,3190.12 3315.28,3222.48 3317.74,3194.73 3310.67,3187.66
  region net D1-: 3333.12,3222.48 3365.48,3190.12 3337.73,3187.66 3330.66,3194.73
  region net DN_TYPEC: 2837.44,3377.92 2816.77,3377.97 2822.08,3368.31 2832.08,3368.29
  region net DP_TYPEC: 2805.44,3386.2 2790.83,3400.81 2801.42,3403.86 2808.49,3396.79
  region net DN_TYPEC: 2805.45,3331.09 2790.81,3345.69 2801.4,3348.75 2808.48,3341.69
  region net DP_TYPEC: 2840.87,3331.08 2826.26,3345.69 2836.85,3348.74 2843.92,3341.67
  region net U3_A5: 2868.78,3319.65 2849.58,3327.3 2850.55,3316.53 2860.67,3312.5
  region net IN+: 3131.87,3589.16 3086.18,3609.94 3092.04,3581.54 3106.62,3574.91
  region net VBUS: 2218.26,3077.3 2143.26,3078.3 2143.26,3365.3 2221.26,3365.3 2227.26,3371.3 2453.26,3371.3 2454.26,3370.3 2454.26,3269.3 2451.26,3266.3 2451.26,3139.3 2368.26,3139.3 2367.26,3138.3 2367.26,3018.3 2361.26,3012.3 2313.26,3012.3 2333.26,3084.3 2333.26,3159.3 2228.26,3157.3 2202.26,3131.3 2182.51,3131.3
  region net R5_1: 2309.66,2688.6 2299.66,2688.6 2268.66,2689.6 2266.66,2725.6 2248.86,2738.1 2112.66,2738.1 2072.66,2778.1 2008.66,2778.1 2009.66,2779.1 2009.66,2808.1 2074.66,2807.1 2122.66,2763.6 2286.66,2763.6 2309.66,2730.6 2309.66,2688.6
  region net C2_2: 2029.66,2843.6 2045.66,2843.6 2060.66,2828.6 1989.66,2828.6 1978.66,2817.6 1978.66,2771.6 1993.66,2756.6 2001.66,2748.6 2001.66,2690.6 1968.66,2690.6 1968.66,2737.6 1953.66,2752.6 1953.66,2826.6 1983.66,2857.6 2061.66,2858.6 2062.66,2857.6 2043.66,2857.6 2029.66,2843.6
  region net C2_1: 2023.66,2690.6 2023.66,2728.6 2122.66,2728.6 2122.66,2690.6 2023.66,2690.6
  region net IN+: 2453.66,2655.54 2453.66,2619.6 2453.66,2580.6 2452.66,2579.6 2442.66,2579.6 2442.66,2578.6 2185.66,2578.6 2185.66,2659.6 2429.66,2659.6 2429.66,2822.6 2427.66,2824.6 2383.66,2824.6 2382.66,2825.6 2382.66,2858.6 2452.66,2858.6 2452.66,2840.6 2453.66,2655.54
  region net IN+: 2323.66,2887.6 2353.66,2887.6 2382.66,2858.6 2382.66,2825.6 2419.66,2825.6 2420.66,2826.6 2420.66,2858.6 2412.66,2858.6 2387.66,2878.6 2352.66,2920.6
  region net R5_1: 2396.66,3017.6 2445.66,3017.6 2445.66,3114.6 2439.66,3120.6 2398.66,3120.6 2396.66,3118.6 2396.66,3017.6
  region net R3_1: 2323.66,2945.6 2423.66,2945.6 2423.66,2979.6 2422.66,2980.6 2324.66,2980.6 2323.66,2979.6
  region net U1_8: 2299.66,2929.6 2298.66,2928.6 2233.66,2928.6 2231.66,2930.6 2231.66,3005.6 2237.66,3011.6 2254.66,3011.6 2235.66,2992.6 2278.66,3011.6 2278.66,2978.6 2299.66,2957.6 2299.66,2929.6
  region net R5_1: 2270.66,2733.6 2335.66,2733.6 2335.66,2704.6 2312.16,2689.1 2292.66,2688.6
  region net R2_1: 2234.66,2858.6 2302.66,2858.6 2321.66,2858.6 2324.66,2861.6 2359.66,2861.6 2359.66,2827.6 2322.66,2827.6 2321.66,2828.6 2234.66,2828.6
  region net IN+: 2234.66,2908.6 2297.66,2908.6 2312.66,2908.6 2324.66,2920.6 2359.66,2920.6 2359.66,2887.6 2356.66,2884.6 2326.66,2884.6 2321.66,2879.6 2234.66,2879.6
  region net IN+: 2319.66,2879.6 2363.66,2879.6 2364.66,2880.6 2364.66,2880.75 2341.66,2903.75
  region net D1_1: 2284.66,3074.6 2290.66,3068.6 2290.66,3032.6 2290.66,3028.6 2223.66,3027.6 2148.66,2952.6 2088.66,2952.6 2060.66,2924.6 1869.66,2924.6 1869.66,3192.6 2003.66,3192.6 2005.66,3190.6 2006.66,3065.6 2183.66,3064.6 2210.66,3064.6 2235.66,3064.6 2235.66,3072.6 2236.66,3074.6 2284.66,3074.6
  pour cut-out net R3_1: 2420.66,3007.6 2420.66,2989.6 2401.66,2989.6 2401.66,3008.6 2400.66,3009.6
  text "Umeko Lab" at 2497,4288.6 h80
Bottom Layer:
  region net 5V: 2576.45,3308.18 2563.52,3295.22 2556.87,3300.65 2571,3314.81
  region net 5V: 2772.67,3115.75 2754.36,3115.71 2758.53,3107.17 2768.53,3107.19
  region net 5V: 2772.94,2988.79 2754.63,2988.75 2758.77,2997.31 2768.77,2997.33
  region net VBUS: 2574.23,3406.19 2561.28,3419.13 2570.26,3422.23 2577.33,3415.16
  region net VBUS: 2574.23,3407.7 2561.27,3394.77 2570.24,3391.65 2577.32,3398.72
  region net 5V: 2373.73,3826.89 2373.62,3845.2 2382.15,3846.1 2382.27,3826.1
  region net 5V: 2357.58,3845.2 2357.47,3826.89 2348.92,3826.1 2349.04,3846.1
  region net 5V: 2325.57,3826.95 2325.57,3845.25 2334.11,3846.1 2334.11,3826.1
  region net DN_TYPEC: 2540.07,2260.85 2540.07,2279.15 2548.62,2275 2548.62,2265
  region net DP_TYPEC: 2427.28,2206.36 2414.34,2193.42 2423.31,2190.31 2430.39,2197.38
  region net DP: 2688.04,3057.45 2688.04,3075.75 2679.49,3071.6 2679.49,3061.6
  region net DN: 2688.04,3107.45 2688.04,3125.75 2679.49,3121.6 2679.49,3111.6
  region net R3_1: 1974.64,2889.85 1961.91,2902.58 1967.14,2909.22 1981.28,2895.08
  region net R5_1: 2330.6,2705.6 2330.6,2723.6 2339,2724.6 2339,2704.6
  region net R3_1: 2302.73,2983.6 2302.72,3001.6 2294.33,3002.6 2294.32,2982.6
  region net R5_1: 2429.63,3099.37 2416.93,3086.62 2422.17,3079.98 2436.29,3094.15
  region net DN: 2038.11,2244.01 2054.13,2252.85 2054.8,2243.47 2045.69,2238.44
  region net DN: 2054.4,2254.75 2041.45,2267.68 2050.42,2270.79 2057.5,2263.73
  region net DP: 2111.85,2263.57 2130.15,2263.57 2126,2272.12 2116,2272.12
  region net DP: 2121.76,2243.32 2108.82,2256.26 2105.71,2247.29 2112.78,2240.21
  region net DN: 2071.98,2055.46 2059.06,2068.43 2067.87,2071.34 2074.93,2064.26
  region net DP: 2088.16,2058.25 2103.89,2067.62 2096.66,2073.25 2086.66,2067.3
  region net VBUS: 3437.14,1954.88 3472.62,1990.4 3441.84,1992.73 3434.77,1985.66
  region net IN+: 2775.06,3593.3 2775.06,3643.5 2751.63,3625.9 2751.63,3610.9
  region net VBUS: 3405.59,3620 3441.09,3584.5 3413.85,3578.61 3399.71,3592.76
  region net VBUS: 2729.17,3377.93 2708.5,3377.96 2713.83,3368.31 2723.83,3368.29
  region net VBUS: 2719.72,3373.31 2705.1,3387.92 2702.05,3377.33 2709.13,3370.26
  region net VBUS: 2910.28,3377.93 2889.61,3377.96 2894.93,3368.31 2904.93,3368.29
  region net U3_A5: 2770,3387.89 2755.35,3373.31 2765.94,3370.24 2773.03,3377.29
  region net VBUS: 2729.17,3341.07 2708.5,3341.04 2713.83,3350.69 2723.83,3350.71
  region net DN_TYPEC: 2802.03,3322.83 2781.36,3322.82 2786.7,3313.18 2796.7,3313.18
  region net DP_TYPEC: 2837.44,3322.81 2816.78,3322.84 2822.1,3313.19 2832.1,3313.17
  region net U3_A5: 2872.84,3341.1 2852.17,3341.01 2857.48,3346.34 2867.48,3346.38
  region net VBUS: 2910.28,3341.07 2889.61,3341.04 2894.93,3350.69 2904.93,3350.71
  text "Umeko Lab" at 2942,4283.6 h80

## Silkscreen, mask and mechanical layers (free items; w line width, h text height)
Top Overlay:
  rectangle: 2135.03,2355.07 2175.03,2414.07
  rectangle: 2207.63,2355.37 2247.63,2414.37
  rectangle: 1910.4,2430.14 1950.4,2489.14
  rectangle: 1983,2430.44 2023,2489.44
  lines w5.98: 1905.62,1948.61 1907.63,1948.61 2255.57,1948.61
  lines w7.99: 1916.66,2660.6 2041.66,2660.6 ; 1921.66,3370.6 2046.66,3370.6 ; 2336.66,3371 2461.66,3371 ; 2341.66,2670.6 2466.66,2670.6
  lines w8: 1916.66,2660.6 1841.66,2660.6 1841.66,2560.6 2041.66,2560.6 2041.66,2660.6 ; 1921.66,3370.6 1846.66,3370.6 1846.66,3270.6 2046.66,3270.6 2046.66,3370.6 ; 2336.66,3371 2261.66,3371 2261.66,3271 2461.66,3271 2461.66,3371 ; 2341.66,2670.6 2266.66,2670.6 2266.66,2570.6 2466.66,2570.6 2466.66,2670.6
  lines w10: 3034.4,2173.46 3034.4,2104.3 3064.4,2104.3 ; 3064.4,2079.53 3064.4,2166.51 ; 3064.4,2304.73 3584.4,2304.73 ; 3096.2,2304.7 3096.2,2338.8 3559.9,2338.8 3559.9,2304.7 ; 3577.3,2081.3 3577.3,2168.27 ; 3584.4,2104.3 3614.4,2104.3 3614.4,2173.46 ; 3154.39,2265.44 3224.39,2265.44 3224.39,2295.44 3154.39,2295.44 3154.39,2265.44 ; 3424.39,2265.44 3494.39,2265.44 3494.39,2295.44 3424.39,2295.44 3424.39,2265.44
  lines w10 net S$106804: 2314.66,3011.6 2452.66,3011.6 2452.66,3082.6 2314.66,3082.6 2314.66,3011.6
  lines w10 net S$21464: 1875.9,3855.5 1875.9,3390.5 1945.9,3320.5 1945.9,3280.5
  lines w10 net S$21468: 2000.9,3855.5 2000.9,3560.5 2240.9,3320.5 2310.9,3320.5 2355.9,3275.5
  lines w10 net S$68450: 1960,2492.44 1960,2346.04 1958.6,2346.04 1901.5,2346.04 1901.5,2497.54 1961.5,2497.54 1961.5,2491.74 ; 2032.6,2492.7 2032.6,2346.3 2031.2,2346.3 1974.1,2346.3 1974.1,2497.8 2034.1,2497.8 2034.1,2492 ; 2184.62,2491.37 2184.62,2344.97 2183.22,2344.97 2126.13,2344.97 2126.13,2496.47 2186.13,2496.47 2186.13,2490.68 ; 2257.22,2491.67 2257.22,2345.27 2255.83,2345.27 2198.73,2345.27 2198.73,2496.77 2258.73,2496.77 2258.73,2490.97
  text "Gnd Th SDQ Vbat" at 2355.2,4212.9 h30
  text "47K" at 2108.6,4121.8 h30 r90
  text "bq2022a" at 2314.9,4092.2 h30
  text "Designed By Umeko /   红米2多功能电源板" at 2675.2,4006.7 h80
  text "10u" at 2287.6,4000.5 h30
  text "10U-Tan" at 2579.4,3858.5 h45 r270
  text "-" at 1815.9,3855.5 h70
  text "_" at 2959.3,3812.6 h60 r90
  text "+" at 2689.69,3796.11 h60 r225
  text "5V" at 2015.9,3780.5 h50 r90
  text "DC-IN" at 2780.8,3767.6 h30
  text "100Ω" at 2456.9,3730 h45 r270
  text "1117ADJ" at 2263.9,3717 h30 r90
  text "220Ω" at 2273.8,3571.2 h45 r270
  text "_" at 3644.9,3497.5 h60 r90
  text "_" at 3306.3,3492.7 h60 r90
  text "_" at 2956.7,3490.6 h60 r90
  text "+" at 3334.09,3478.01 h60 r225
  text "+" at 2687.09,3474.11 h60 r225
  text "+" at 2979.39,3470.21 h60 r225
  text "FAN-5V" at 3431.5,3447.1 h30
  text "DC-IN" at 2778.2,3445.6 h30
  text "FAN-24V" at 3064.8,3443.3 h30
  text "6V2A" at 2492.2,3437.3 h30
  text "10u" at 3732.1,3404.8 h30
  text "10UF" at 2076.66,3349.1 h45
  text "100u" at 3951.9,3321 h30 r90
  text "OUT" at 2381.66,3253.6 h50 r180
  text "+" at 2447.66,3213.6 h70 r225
  text "-" at 1922.66,3210.6 h70 r180
  text "5.1K" at 3033.2,3189.1 h30 r90
  text "TVS" at 2891.6,3142 h30
  text "1u" at 2593.6,3062.1 h30 r90
  text "10u" at 2520,3057.8 h30 r90
  text "0.1u" at 2664.8,3044.1 h30 r90
  text "10u" at 3744.4,3020.8 h30
  text "6V1A" at 3614.6,3013.3 h30
  text "4.7UH" at 1991.66,3009.1 h45
  text "100u" at 3952.4,2971.3 h30 r90
  text "10u" at 2566.9,2900.6 h30 r90
  text "SL2.1A" at 2880.9,2796.5 h30 r90
  text "10u" at 2568.2,2769.9 h30 r90
  text "100p" at 1969.57,2731.75 h30 r352
  text "100K" at 2096.66,2721.6 h30
  text "8.2K" at 2216.66,2721.6 h30
  text "+" at 2447.66,2684.6 h70 r225
  text "12Mhz" at 2553.5,2684.6 h30
  text "-" at 1922.66,2680.6 h70 r180
  text "IN" at 2394.66,2678.6 h60 r90
  text "10u" at 3739.5,2650.4 h30
  text "6V1A" at 3627.2,2648.9 h30
  text "100u" at 3956.4,2588.3 h30 r90
  text "Flash" at 2131.2,2498.7 h30
  text "HUB" at 1897.7,2493.6 h30
  text "手机刷机" at 2110.2,2326.5 h55 r90
  text "接下位机" at 1879.2,2321.2 h55 r90
  text "10u" at 3746.5,2298.7 h30
  text "6V1A" at 3616.9,2283.4 h30
  text "100u" at 3957.6,2216.3 h30 r90
  text "常规USB" at 3237.2,2181.1 h50
  text "G" at 2193.66,2173.1 h25 r180
  text "D+" at 2113.16,2148.1 h25
  text "5V" at 1944.86,2145.7 h25
  text "D-" at 2031.56,2145.9 h25
  text "小郑K6专用" at 3188.5,1984.9 h50
  text "6V1A" at 3605.6,1922.8 h30
  text "BTB_Slot" at 2643.2,1890.2 h30
  text "FPC_Slot" at 2060.2,1882.2 h30
  text "兼容小郑K6主板" at 3591.9,1853.5 h50
Bottom Overlay:
  text "DC-DC可调降压模块" at 2210.66,3276.6 h65 r90
  text "OUT-" at 1967.05,3275.6 h50 r91
  text "OUT+" at 2362.96,3275.6 h50 r91
  text "开关频率：1.5MHz" at 2121.66,3170.6 h50 r90
  text "OUT:0.8V-20V" at 2006.66,3128.6 h50 r90
  text "电流：max3A" at 2064.66,3110.6 h50 r90
  text "IN:4.5V-28V" at 1945.66,3098.6 h50 r90
  text "MP1584EN" at 1892.66,3076.6 h50 r90
  text "IN-" at 1966.83,2735.6 h50 r90
  text "IN+" at 2363.27,2735.9 h50 r90
Top Solder:
  region: 2952,4278.6 2952,4288.6 2962,4278.6 2952,4278.6
  region: 2492,4358.6 2492,4278.6 2937,4278.6 2942,4283.6 2942,4358.6
Bottom Solder:
  region: 2492,4358.6 2492,4278.6 2947,4278.6 2947,4358.6
Document:
  region: 3564.56,2309.45 3564.56,2340.56 3561.41,2343.71 3095.27,2343.71 3091.72,2340.16 3091.72,2309.45 3100.78,2309.45 3100.78,2334.26 3555.5,2334.26 3555.5,2309.45